# Altium PCB PCB1.PcbDoc
Units mil, origin at the board's own origin, x right, y up, seen from the top; angles counter-clockwise.
Board outline 2425 x 2195 mil, 2 copper layers (Top Layer, Bottom Layer); 9 components, 16 nets, 101 pads, 0 vias.
Unrouted connection lines stored in the file: 2.
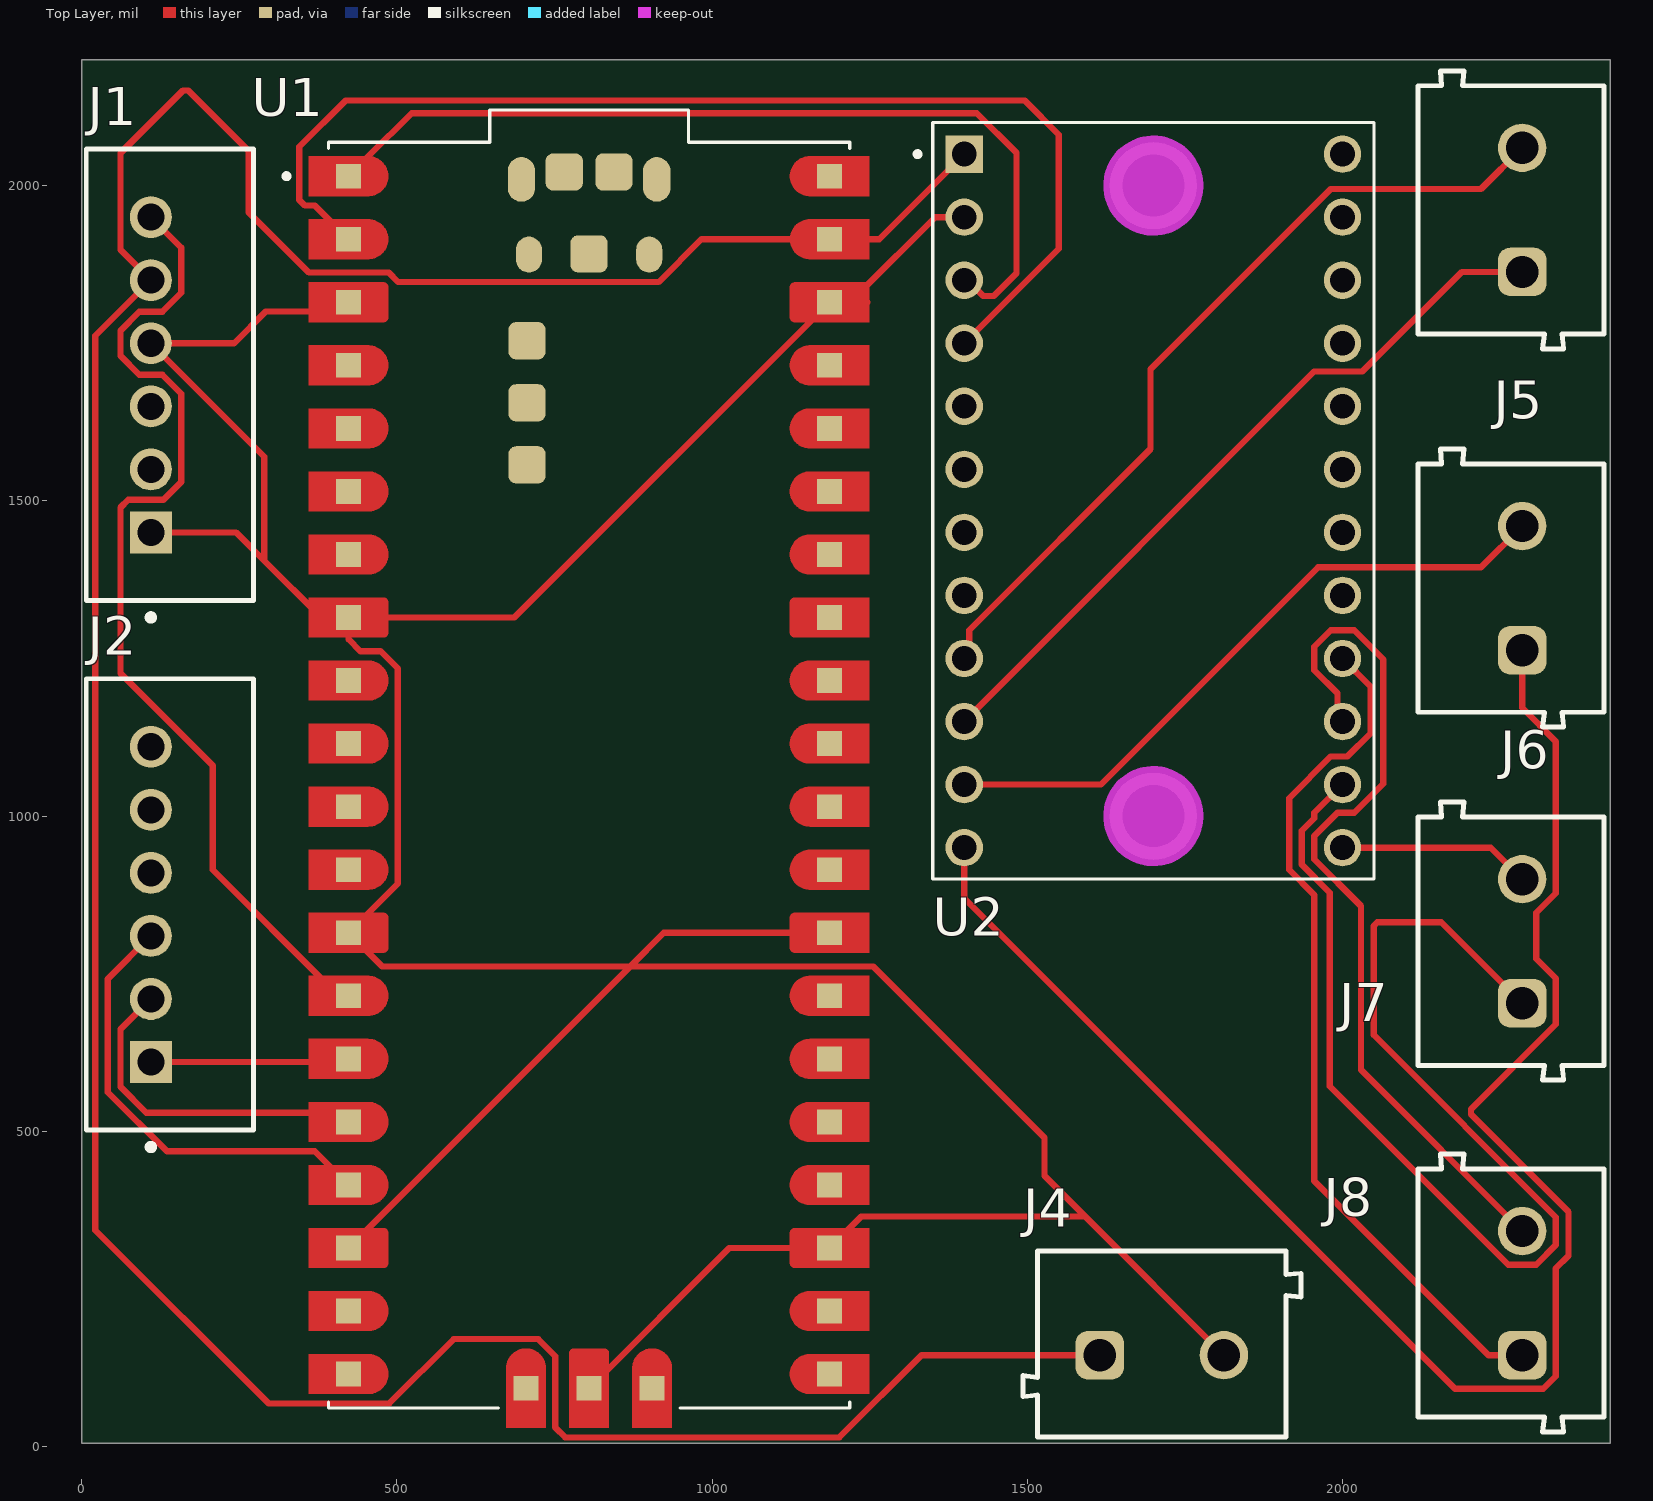
[diagram p0: Top Layer view]
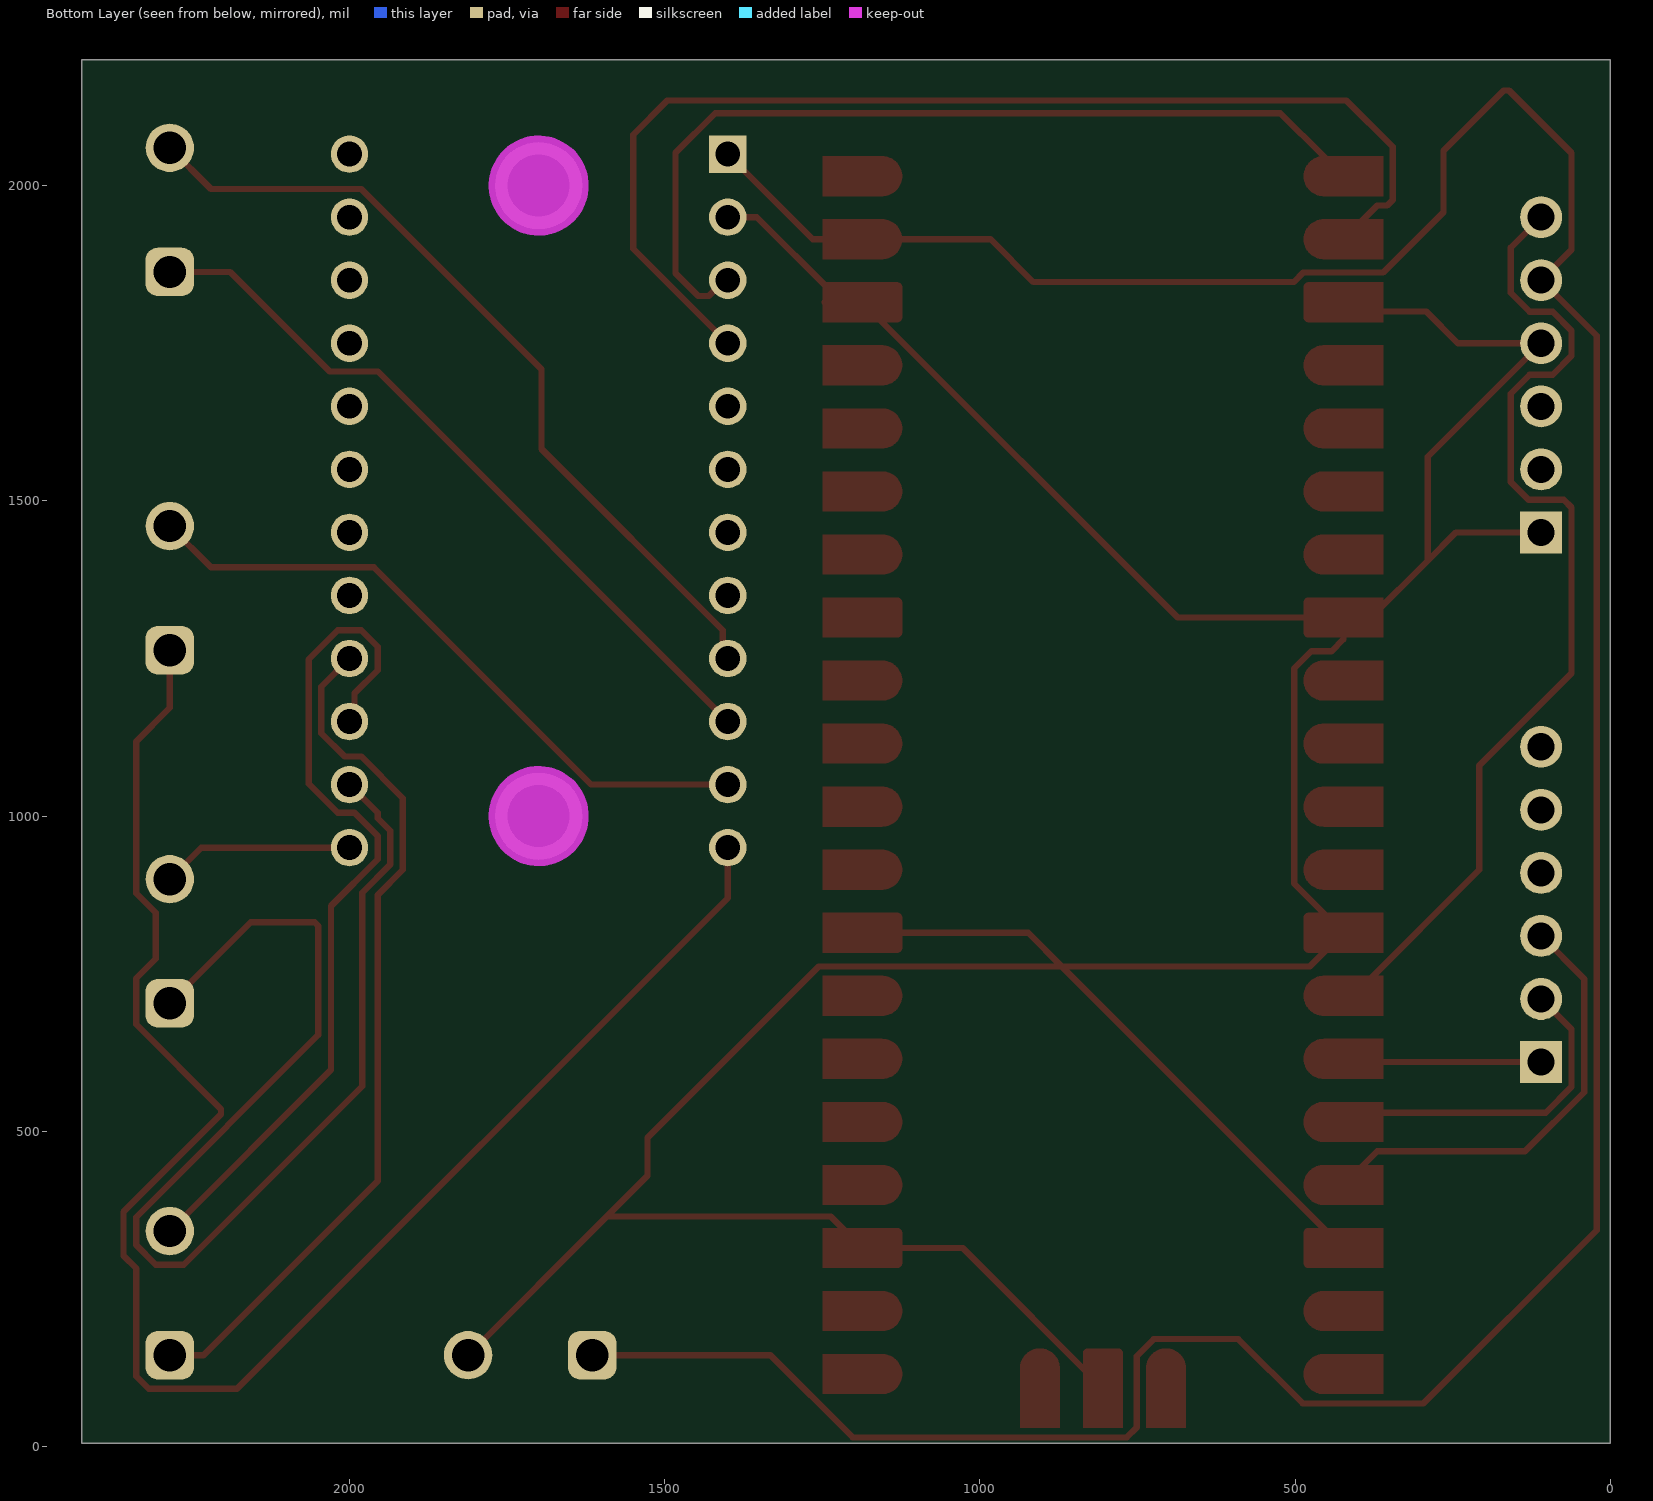
[diagram p1: Bottom Layer view, seen from below]
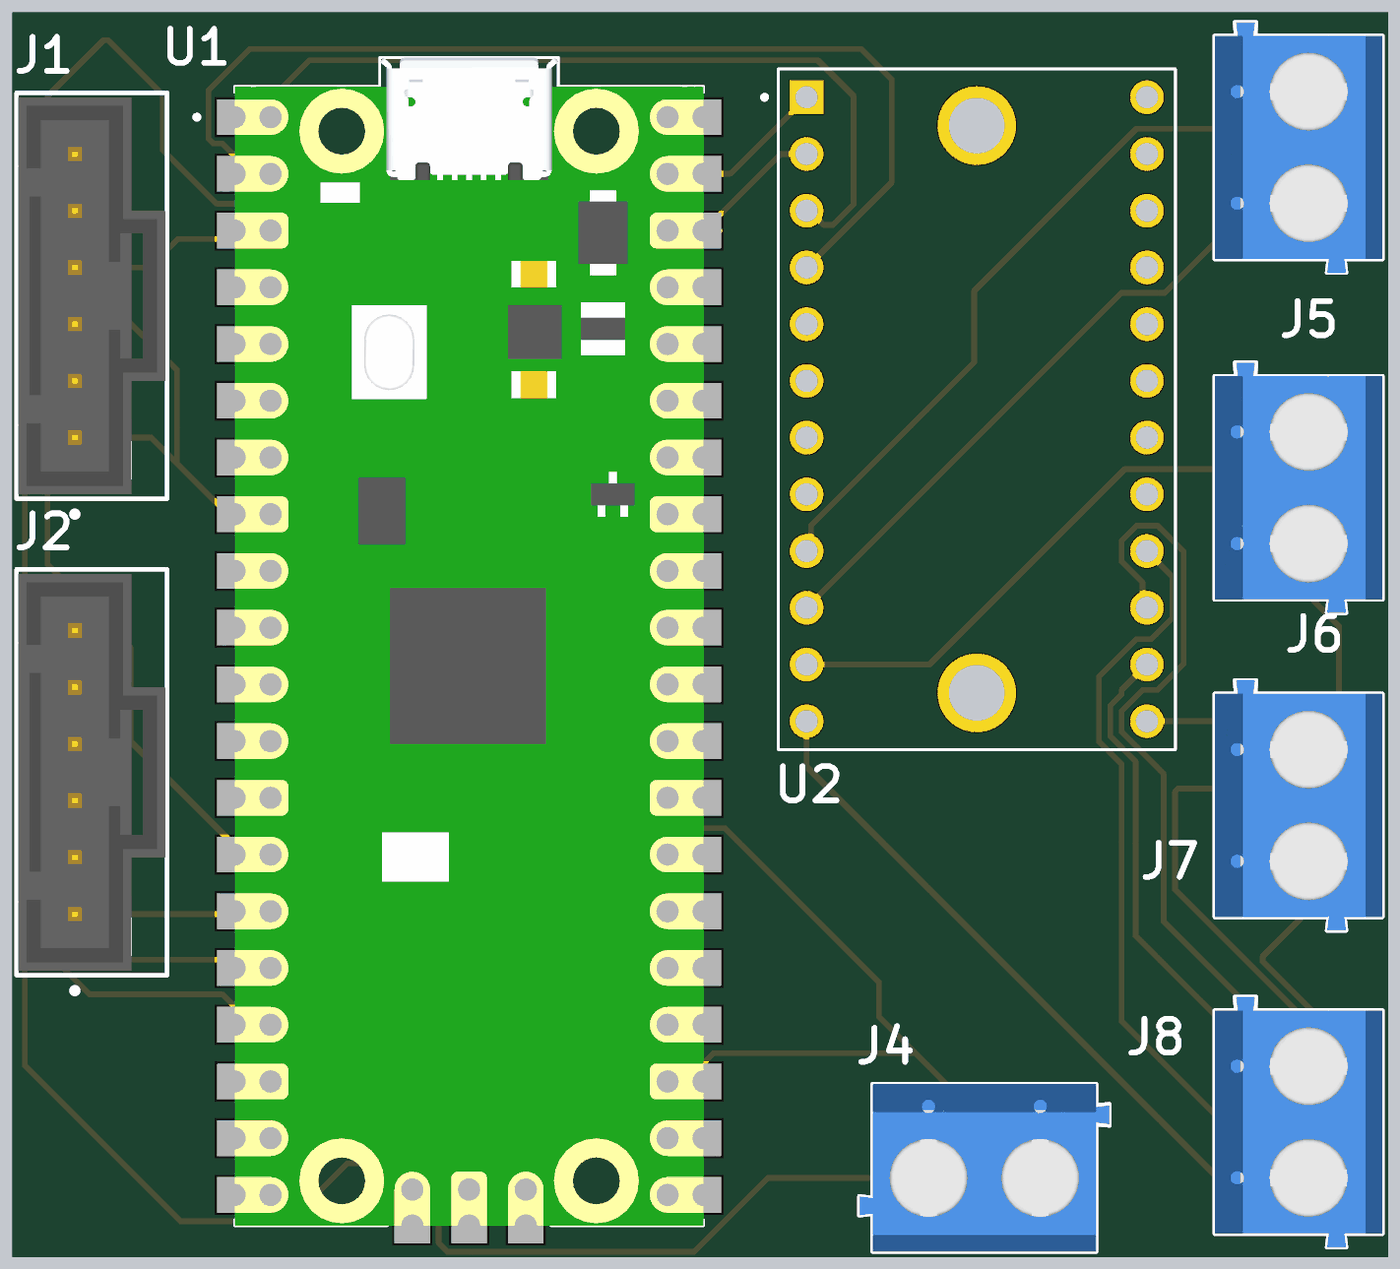
[diagram p2: 3D render of the assembled board from above, using the file's embedded part models]

## Layer stack, top to bottom
Top Solder: solder mask 0.4, Solder Resist, Dk 3.5
Top Layer: signal copper 1.4
Dielectric 1: dielectric 12.6, FR-4, Dk 4.8
Bottom Layer: signal copper 1.4
Bottom Solder: solder mask 0.4, Solder Resist, Dk 3.5

## Board outline
0,5 2425,5 2425,2200 0,2200

## Design rules (kind name [scope] priority, off if disabled: settings)
Clearance [All] p1: gap=10 ignorepadtopadclearanceinfootprint=FALSE except(0: Arc-Hole Track-Hole SMDPad-Hole THPad-Hole Via-Hole Fill-Hole Poly-Hole Region-Hole Text-Hole)
PolygonConnect [All] p1: connectstyle=Relief reliefconductorwidth=10 reliefentries=4 polygonreliefangle="90 Angle" airgapwidth=10
RoutingVias [All] p1: holewidth=28 width=50 viastyle="Through Hole" minholewidth=28 minwidth=50 maxholewidth=28 maxwidth=50
SolderMaskExpansion [All] p1: expansion=4 istentingtop=FALSE
Width [All] p1: maxlimit=10 minlimit=10 preferedwidth=10
30 further rules are at their usual default settings.

## Components (designator, comment, footprint, x,y, rotation, side; value= is the part's Value field where it differs from the comment)
J1 "0705430005" FP-0705430005-MFG 110,1700 r270 top
J2 "0705430005" FP-0705430005-MFG 110,860 r270 top
J4 "691102710002" 691102710002 1713.43,162.72 r0 top
J5 "691102710002" 691102710002 2267.28,1961.57 r90 top
J6 "691102710002" 691102710002 2267.28,1361.57 r90 top
J7 "691102710002" 691102710002 2267.28,801.57 r90 top
J8 "691102710002" 691102710002 2267.28,243.43 r90 top
U1 "SC0915" MODULE_SC0915 805,1065 r0 top
U2 "2717" MODULE_2717 1700,1500 r0 top

## Footprints (in the part's own frame and the unit in brackets; to place one, negate y for a bottom-side part, rotate by r counter-clockwise, add the part's x,y. Pads: shape width x height; smd on the part's side, far side on the other; paste and mask are expansions set on the pad)
691102710002 [mm] "5,00mm - modular - blue - Horizontal entry with pressure clamp - 9,9 mm height - 02p"
  rrect50% 1.95x1.95 hole 1.3: 1(-2.5,-0.45)
  round 1.95 hole 1.3: 2(2.5,-0.45)
  silkscreen extent -5.6,-3.75 5.6,3.75, body extent -5.6,-3.75 5.6,3.75, height 9.96
FP-0705430005-MFG [mm]
  rect 1.69x1.69 hole 1.09 paste-1000 mask+0: 1(6.35,0)
  round 1.69 hole 1.09 paste-1000 mask+0: 2(3.81,0) 3(1.27,0) 4(-1.27,0) 5(-3.81,0) 6(-6.35,0)
  silkscreen extent -9.09,-2.61 9.9,4.13, body extent -9.19,-2.71 9.19,4.23, height 0.25
MODULE_2717 [mm]
  rect 1.508x1.508 / inner round 1.508 / far side rect 1.508x1.508 hole 1 mask+0.05: 1(-7.62,13.97)
  round 1.508 hole 1 mask+0.05: 2(-7.62,11.43) 3(-7.62,8.89) 4(-7.62,6.35) 5(-7.62,3.81) 6(-7.62,1.27) 7(-7.62,-1.27) 8(-7.62,-3.81) 9(-7.62,-6.35) 10(-7.62,-8.89) 11(-7.62,-11.43) 12(-7.62,-13.97) 13(7.62,-13.97) 14(7.62,-11.43) 15(7.62,-8.89) 16(7.62,-6.35) 17(7.62,-3.81) 18(7.62,-1.27) 19(7.62,1.27) 20(7.62,3.81) 21(7.62,6.35) 22(7.62,8.89) 23(7.62,11.43) 24(7.62,13.97)
  round 3.516 hole 2.5 mask+0.05: P1(0,12.7) P2(0,-12.7)
  Keep-Out Layer circle w2.032: c0,-12.7 r1
  Keep-Out Layer circle w2.032: c0,-12.7 r1
  Keep-Out Layer circle w2.032: c0,12.7 r1
  Keep-Out Layer circle w2.032: c0,12.7 r1
  silkscreen extent -9.6,-15.24 8.89,15.24
MODULE_SC0915 [mm]
  rect 1x1 smd paste-1 mask+0: 1(-9.69,24.13) 2(-9.69,21.59) 3(-9.69,19.05) 4(-9.69,16.51) 5(-9.69,13.97) 6(-9.69,11.43) 7(-9.69,8.89) 8(-9.69,6.35) 9(-9.69,3.81) 10(-9.69,1.27) 11(-9.69,-1.27) 12(-9.69,-3.81) 13(-9.69,-6.35) 14(-9.69,-8.89) 15(-9.69,-11.43) 16(-9.69,-13.97) 17(-9.69,-16.51) 18(-9.69,-19.05) 19(-9.69,-21.59) 20(-9.69,-24.13) 21(9.69,-24.13) 22(9.69,-21.59) 23(9.69,-19.05) 24(9.69,-16.51) 25(9.69,-13.97) 26(9.69,-11.43) 27(9.69,-8.89) 28(9.69,-6.35) 29(9.69,-3.81) 30(9.69,-1.27) 31(9.69,1.27) 32(9.69,3.81) 33(9.69,6.35) 34(9.69,8.89) 35(9.69,11.43) 36(9.69,13.97) 37(9.69,16.51) 38(9.69,19.05) 39(9.69,21.59) 40(9.69,24.13) D1(-2.54,-24.7) D2(0,-24.7) D3(2.54,-24.7)
  oval 1.1x1.8 smd: A(-2.725,24) B(2.725,24)
  oval 1.05x1.45 smd: C(-2.425,20.97) D(2.425,20.97)
  rrect40% 1.5x1.5 smd: TP1(0,21) TP2(1,24.3) TP3(-1,24.3) TP4(-2.5,17.5) TP5(-2.5,15) TP6(-2.5,12.5)
  Top Layer region: -8.848,4.609 -8.806,4.606 -8.765,4.6 -8.724,4.593 -8.683,4.583 -8.643,4.571 -8.603,4.557 -8.565,4.541 -8.527,4.523 -8.49,4.503 -8.454,4.481 -8.42,4.457 -8.387,4.432 -8.355,4.405 -8.324,4.376 -8.295,4.345 -8.268,4.313 -8.243,4.28 -8.219,4.246 -8.197,4.21 -8.177,4.173 -8.159,4.135 -8.143,4.097 -8.129,4.057 -8.117,4.017 -8.107,3.976 -8.1,3.935 -8.094,3.894 -8.091,3.852 -8.09,3.81 -8.091,3.768 -8.094,3.726 -8.1,3.685 -8.107,3.644 -8.117,3.603 -8.129,3.563 -8.143,3.523 -8.159,3.485 -8.177,3.447 -8.197,3.41 -8.219,3.374 -8.243,3.34 -8.268,3.307 -8.295,3.275 -8.324,3.244 -8.355,3.215 -8.387,3.188 -8.42,3.163 -8.454,3.139 -8.49,3.117 -8.527,3.097 -8.565,3.079 -8.603,3.063 -8.643,3.049 -8.683,3.037 -8.724,3.027 -8.765,3.02 -8.806,3.014 -8.848,3.011 -8.89,3.01 -11.29,3.01 -11.29,4.61 -8.89,4.61
  Top Layer region: -8.848,2.069 -8.806,2.066 -8.765,2.06 -8.724,2.053 -8.683,2.043 -8.643,2.031 -8.603,2.017 -8.565,2.001 -8.527,1.983 -8.49,1.963 -8.454,1.941 -8.42,1.917 -8.387,1.892 -8.355,1.865 -8.324,1.836 -8.295,1.805 -8.268,1.773 -8.243,1.74 -8.219,1.706 -8.197,1.67 -8.177,1.633 -8.159,1.595 -8.143,1.557 -8.129,1.517 -8.117,1.477 -8.107,1.436 -8.1,1.395 -8.094,1.354 -8.091,1.312 -8.09,1.27 -8.091,1.228 -8.094,1.186 -8.1,1.145 -8.107,1.104 -8.117,1.063 -8.129,1.023 -8.143,0.983 -8.159,0.945 -8.177,0.907 -8.197,0.87 -8.219,0.834 -8.243,0.8 -8.268,0.767 -8.295,0.735 -8.324,0.704 -8.355,0.675 -8.387,0.648 -8.42,0.623 -8.454,0.599 -8.49,0.577 -8.527,0.557 -8.565,0.539 -8.603,0.523 -8.643,0.509 -8.683,0.497 -8.724,0.487 -8.765,0.48 -8.806,0.474 -8.848,0.471 -8.89,0.47 -11.29,0.47 -11.29,2.07 -8.89,2.07
  Top Layer region: -8.848,-0.471 -8.806,-0.474 -8.765,-0.48 -8.724,-0.487 -8.683,-0.497 -8.643,-0.509 -8.603,-0.523 -8.565,-0.539 -8.527,-0.557 -8.49,-0.577 -8.454,-0.599 -8.42,-0.623 -8.387,-0.648 -8.355,-0.675 -8.324,-0.704 -8.295,-0.735 -8.268,-0.767 -8.243,-0.8 -8.219,-0.834 -8.197,-0.87 -8.177,-0.907 -8.159,-0.945 -8.143,-0.983 -8.129,-1.023 -8.117,-1.063 -8.107,-1.104 -8.1,-1.145 -8.094,-1.186 -8.091,-1.228 -8.09,-1.27 -8.091,-1.312 -8.094,-1.354 -8.1,-1.395 -8.107,-1.436 -8.117,-1.477 -8.129,-1.517 -8.143,-1.557 -8.159,-1.595 -8.177,-1.633 -8.197,-1.67 -8.219,-1.706 -8.243,-1.74 -8.268,-1.773 -8.295,-1.805 -8.324,-1.836 -8.355,-1.865 -8.387,-1.892 -8.42,-1.917 -8.454,-1.941 -8.49,-1.963 -8.527,-1.983 -8.565,-2.001 -8.603,-2.017 -8.643,-2.031 -8.683,-2.043 -8.724,-2.053 -8.765,-2.06 -8.806,-2.066 -8.848,-2.069 -8.89,-2.07 -11.29,-2.07 -11.29,-0.47 -8.89,-0.47
  Top Layer region: -8.848,-3.011 -8.806,-3.014 -8.765,-3.02 -8.724,-3.027 -8.683,-3.037 -8.643,-3.049 -8.603,-3.063 -8.565,-3.079 -8.527,-3.097 -8.49,-3.117 -8.454,-3.139 -8.42,-3.163 -8.387,-3.188 -8.355,-3.215 -8.324,-3.244 -8.295,-3.275 -8.268,-3.307 -8.243,-3.34 -8.219,-3.374 -8.197,-3.41 -8.177,-3.447 -8.159,-3.485 -8.143,-3.523 -8.129,-3.563 -8.117,-3.603 -8.107,-3.644 -8.1,-3.685 -8.094,-3.726 -8.091,-3.768 -8.09,-3.81 -8.091,-3.852 -8.094,-3.894 -8.1,-3.935 -8.107,-3.976 -8.117,-4.017 -8.129,-4.057 -8.143,-4.097 -8.159,-4.135 -8.177,-4.173 -8.197,-4.21 -8.219,-4.246 -8.243,-4.28 -8.268,-4.313 -8.295,-4.345 -8.324,-4.376 -8.355,-4.405 -8.387,-4.432 -8.42,-4.457 -8.454,-4.481 -8.49,-4.503 -8.527,-4.523 -8.565,-4.541 -8.603,-4.557 -8.643,-4.571 -8.683,-4.583 -8.724,-4.593 -8.765,-4.6 -8.806,-4.606 -8.848,-4.609 -8.89,-4.61 -11.29,-4.61 -11.29,-3.01 -8.89,-3.01
  Top Layer region: -8.848,-8.091 -8.806,-8.094 -8.765,-8.1 -8.724,-8.107 -8.683,-8.117 -8.643,-8.129 -8.603,-8.143 -8.565,-8.159 -8.527,-8.177 -8.49,-8.197 -8.454,-8.219 -8.42,-8.243 -8.387,-8.268 -8.355,-8.295 -8.324,-8.324 -8.295,-8.355 -8.268,-8.387 -8.243,-8.42 -8.219,-8.454 -8.197,-8.49 -8.177,-8.527 -8.159,-8.565 -8.143,-8.603 -8.129,-8.643 -8.117,-8.683 -8.107,-8.724 -8.1,-8.765 -8.094,-8.806 -8.091,-8.848 -8.09,-8.89 -8.091,-8.932 -8.094,-8.974 -8.1,-9.015 -8.107,-9.056 -8.117,-9.097 -8.129,-9.137 -8.143,-9.177 -8.159,-9.215 -8.177,-9.253 -8.197,-9.29 -8.219,-9.326 -8.243,-9.36 -8.268,-9.393 -8.295,-9.425 -8.324,-9.456 -8.355,-9.485 -8.387,-9.512 -8.42,-9.537 -8.454,-9.561 -8.49,-9.583 -8.527,-9.603 -8.565,-9.621 -8.603,-9.637 -8.643,-9.651 -8.683,-9.663 -8.724,-9.673 -8.765,-9.68 -8.806,-9.686 -8.848,-9.689 -8.89,-9.69 -11.29,-9.69 -11.29,-8.09 -8.89,-8.09
  Top Layer region: -8.848,-10.631 -8.806,-10.634 -8.765,-10.64 -8.724,-10.647 -8.683,-10.657 -8.643,-10.669 -8.603,-10.683 -8.565,-10.699 -8.527,-10.717 -8.49,-10.737 -8.454,-10.759 -8.42,-10.783 -8.387,-10.808 -8.355,-10.835 -8.324,-10.864 -8.295,-10.895 -8.268,-10.927 -8.243,-10.96 -8.219,-10.994 -8.197,-11.03 -8.177,-11.067 -8.159,-11.105 -8.143,-11.143 -8.129,-11.183 -8.117,-11.223 -8.107,-11.264 -8.1,-11.305 -8.094,-11.346 -8.091,-11.388 -8.09,-11.43 -8.091,-11.472 -8.094,-11.514 -8.1,-11.555 -8.107,-11.596 -8.117,-11.637 -8.129,-11.677 -8.143,-11.717 -8.159,-11.755 -8.177,-11.793 -8.197,-11.83 -8.219,-11.866 -8.243,-11.9 -8.268,-11.933 -8.295,-11.965 -8.324,-11.996 -8.355,-12.025 -8.387,-12.052 -8.42,-12.077 -8.454,-12.101 -8.49,-12.123 -8.527,-12.143 -8.565,-12.161 -8.603,-12.177 -8.643,-12.191 -8.683,-12.203 -8.724,-12.213 -8.765,-12.22 -8.806,-12.226 -8.848,-12.229 -8.89,-12.23 -11.29,-12.23 -11.29,-10.63 -8.89,-10.63
  Top Layer region: -8.848,-13.171 -8.806,-13.174 -8.765,-13.18 -8.724,-13.187 -8.683,-13.197 -8.643,-13.209 -8.603,-13.223 -8.565,-13.239 -8.527,-13.257 -8.49,-13.277 -8.454,-13.299 -8.42,-13.323 -8.387,-13.348 -8.355,-13.375 -8.324,-13.404 -8.295,-13.435 -8.268,-13.467 -8.243,-13.5 -8.219,-13.534 -8.197,-13.57 -8.177,-13.607 -8.159,-13.645 -8.143,-13.683 -8.129,-13.723 -8.117,-13.763 -8.107,-13.804 -8.1,-13.845 -8.094,-13.886 -8.091,-13.928 -8.09,-13.97 -8.091,-14.012 -8.094,-14.054 -8.1,-14.095 -8.107,-14.136 -8.117,-14.177 -8.129,-14.217 -8.143,-14.257 -8.159,-14.295 -8.177,-14.333 -8.197,-14.37 -8.219,-14.406 -8.243,-14.44 -8.268,-14.473 -8.295,-14.505 -8.324,-14.536 -8.355,-14.565 -8.387,-14.592 -8.42,-14.617 -8.454,-14.641 -8.49,-14.663 -8.527,-14.683 -8.565,-14.701 -8.603,-14.717 -8.643,-14.731 -8.683,-14.743 -8.724,-14.753 -8.765,-14.76 -8.806,-14.766 -8.848,-14.769 -8.89,-14.77 -11.29,-14.77 -11.29,-13.17 -8.89,-13.17
  Top Layer region: -8.848,-15.711 -8.806,-15.714 -8.765,-15.72 -8.724,-15.727 -8.683,-15.737 -8.643,-15.749 -8.603,-15.763 -8.565,-15.779 -8.527,-15.797 -8.49,-15.817 -8.454,-15.839 -8.42,-15.863 -8.387,-15.888 -8.355,-15.915 -8.324,-15.944 -8.295,-15.975 -8.268,-16.007 -8.243,-16.04 -8.219,-16.074 -8.197,-16.11 -8.177,-16.147 -8.159,-16.185 -8.143,-16.223 -8.129,-16.263 -8.117,-16.303 -8.107,-16.344 -8.1,-16.385 -8.094,-16.426 -8.091,-16.468 -8.09,-16.51 -8.091,-16.552 -8.094,-16.594 -8.1,-16.635 -8.107,-16.676 -8.117,-16.717 -8.129,-16.757 -8.143,-16.797 -8.159,-16.835 -8.177,-16.873 -8.197,-16.91 -8.219,-16.946 -8.243,-16.98 -8.268,-17.013 -8.295,-17.045 -8.324,-17.076 -8.355,-17.105 -8.387,-17.132 -8.42,-17.157 -8.454,-17.181 -8.49,-17.203 -8.527,-17.223 -8.565,-17.241 -8.603,-17.257 -8.643,-17.271 -8.683,-17.283 -8.724,-17.293 -8.765,-17.3 -8.806,-17.306 -8.848,-17.309 -8.89,-17.31 -11.29,-17.31 -11.29,-15.71 -8.89,-15.71
  Top Layer region: -8.848,-20.791 -8.806,-20.794 -8.765,-20.8 -8.724,-20.807 -8.683,-20.817 -8.643,-20.829 -8.603,-20.843 -8.565,-20.859 -8.527,-20.877 -8.49,-20.897 -8.454,-20.919 -8.42,-20.943 -8.387,-20.968 -8.355,-20.995 -8.324,-21.024 -8.295,-21.055 -8.268,-21.087 -8.243,-21.12 -8.219,-21.154 -8.197,-21.19 -8.177,-21.227 -8.159,-21.265 -8.143,-21.303 -8.129,-21.343 -8.117,-21.383 -8.107,-21.424 -8.1,-21.465 -8.094,-21.506 -8.091,-21.548 -8.09,-21.59 -8.091,-21.632 -8.094,-21.674 -8.1,-21.715 -8.107,-21.756 -8.117,-21.797 -8.129,-21.837 -8.143,-21.877 -8.159,-21.915 -8.177,-21.953 -8.197,-21.99 -8.219,-22.026 -8.243,-22.06 -8.268,-22.093 -8.295,-22.125 -8.324,-22.156 -8.355,-22.185 -8.387,-22.212 -8.42,-22.237 -8.454,-22.261 -8.49,-22.283 -8.527,-22.303 -8.565,-22.321 -8.603,-22.337 -8.643,-22.351 -8.683,-22.363 -8.724,-22.373 -8.765,-22.38 -8.806,-22.386 -8.848,-22.389 -8.89,-22.39 -11.29,-22.39 -11.29,-20.79 -8.89,-20.79
  Top Layer region: -8.848,-23.331 -8.806,-23.334 -8.765,-23.34 -8.724,-23.347 -8.683,-23.357 -8.643,-23.369 -8.603,-23.383 -8.565,-23.399 -8.527,-23.417 -8.49,-23.437 -8.454,-23.459 -8.42,-23.483 -8.387,-23.508 -8.355,-23.535 -8.324,-23.564 -8.295,-23.595 -8.268,-23.627 -8.243,-23.66 -8.219,-23.694 -8.197,-23.73 -8.177,-23.767 -8.159,-23.805 -8.143,-23.843 -8.129,-23.883 -8.117,-23.923 -8.107,-23.964 -8.1,-24.005 -8.094,-24.046 -8.091,-24.088 -8.09,-24.13 -8.091,-24.172 -8.094,-24.214 -8.1,-24.255 -8.107,-24.296 -8.117,-24.337 -8.129,-24.377 -8.143,-24.417 -8.159,-24.455 -8.177,-24.493 -8.197,-24.53 -8.219,-24.566 -8.243,-24.6 -8.268,-24.633 -8.295,-24.665 -8.324,-24.696 -8.355,-24.725 -8.387,-24.752 -8.42,-24.777 -8.454,-24.801 -8.49,-24.823 -8.527,-24.843 -8.565,-24.861 -8.603,-24.877 -8.643,-24.891 -8.683,-24.903 -8.724,-24.913 -8.765,-24.92 -8.806,-24.926 -8.848,-24.929 -8.89,-24.93 -11.29,-24.93 -11.29,-23.33 -8.89,-23.33
  Top Layer region: -8.269,19.849 -8.259,19.848 -8.248,19.846 -8.238,19.843 -8.228,19.84 -8.218,19.837 -8.209,19.833 -8.199,19.828 -8.19,19.823 -8.181,19.818 -8.172,19.812 -8.164,19.805 -8.156,19.799 -8.149,19.791 -8.141,19.784 -8.135,19.776 -8.128,19.768 -8.122,19.759 -8.117,19.75 -8.112,19.741 -8.107,19.731 -8.103,19.722 -8.1,19.712 -8.097,19.702 -8.094,19.692 -8.092,19.681 -8.091,19.671 -8.09,19.66 -8.09,19.65 -8.09,18.45 -8.09,18.44 -8.091,18.429 -8.092,18.419 -8.094,18.408 -8.097,18.398 -8.1,18.388 -8.103,18.378 -8.107,18.369 -8.112,18.359 -8.117,18.35 -8.122,18.341 -8.128,18.332 -8.135,18.324 -8.141,18.316 -8.149,18.309 -8.156,18.301 -8.164,18.295 -8.172,18.288 -8.181,18.282 -8.19,18.277 -8.199,18.272 -8.209,18.267 -8.218,18.263 -8.228,18.26 -8.238,18.257 -8.248,18.254 -8.259,18.252 -8.269,18.251 -8.28,18.25 -11.29,18.25 -11.29,19.85 -8.28,19.85
  Top Layer region: -8.269,7.149 -8.259,7.148 -8.248,7.146 -8.238,7.143 -8.228,7.14 -8.218,7.137 -8.209,7.133 -8.199,7.128 -8.19,7.123 -8.181,7.118 -8.172,7.112 -8.164,7.105 -8.156,7.099 -8.149,7.091 -8.141,7.084 -8.135,7.076 -8.128,7.068 -8.122,7.059 -8.117,7.05 -8.112,7.041 -8.107,7.031 -8.103,7.022 -8.1,7.012 -8.097,7.002 -8.094,6.992 -8.092,6.981 -8.091,6.971 -8.09,6.96 -8.09,6.95 -8.09,5.75 -8.09,5.74 -8.091,5.729 -8.092,5.719 -8.094,5.708 -8.097,5.698 -8.1,5.688 -8.103,5.678 -8.107,5.669 -8.112,5.659 -8.117,5.65 -8.122,5.641 -8.128,5.632 -8.135,5.624 -8.141,5.616 -8.149,5.609 -8.156,5.601 -8.164,5.595 -8.172,5.588 -8.181,5.582 -8.19,5.577 -8.199,5.572 -8.209,5.567 -8.218,5.563 -8.228,5.56 -8.238,5.557 -8.248,5.554 -8.259,5.552 -8.269,5.551 -8.28,5.55 -11.29,5.55 -11.29,7.15 -8.28,7.15
  Top Layer region: -8.269,-5.551 -8.259,-5.552 -8.248,-5.554 -8.238,-5.557 -8.228,-5.56 -8.218,-5.563 -8.209,-5.567 -8.199,-5.572 -8.19,-5.577 -8.181,-5.582 -8.172,-5.588 -8.164,-5.595 -8.156,-5.601 -8.149,-5.609 -8.141,-5.616 -8.135,-5.624 -8.128,-5.632 -8.122,-5.641 -8.117,-5.65 -8.112,-5.659 -8.107,-5.669 -8.103,-5.678 -8.1,-5.688 -8.097,-5.698 -8.094,-5.708 -8.092,-5.719 -8.091,-5.729 -8.09,-5.74 -8.09,-5.75 -8.09,-6.95 -8.09,-6.96 -8.091,-6.971 -8.092,-6.981 -8.094,-6.992 -8.097,-7.002 -8.1,-7.012 -8.103,-7.022 -8.107,-7.031 -8.112,-7.041 -8.117,-7.05 -8.122,-7.059 -8.128,-7.068 -8.135,-7.076 -8.141,-7.084 -8.149,-7.091 -8.156,-7.099 -8.164,-7.105 -8.172,-7.112 -8.181,-7.118 -8.19,-7.123 -8.199,-7.128 -8.209,-7.133 -8.218,-7.137 -8.228,-7.14 -8.238,-7.143 -8.248,-7.146 -8.259,-7.148 -8.269,-7.149 -8.28,-7.15 -11.29,-7.15 -11.29,-5.55 -8.28,-5.55
  Top Layer region: -8.269,-18.251 -8.259,-18.252 -8.248,-18.254 -8.238,-18.257 -8.228,-18.26 -8.218,-18.263 -8.209,-18.267 -8.199,-18.272 -8.19,-18.277 -8.181,-18.282 -8.172,-18.288 -8.164,-18.295 -8.156,-18.301 -8.149,-18.309 -8.141,-18.316 -8.135,-18.324 -8.128,-18.332 -8.122,-18.341 -8.117,-18.35 -8.112,-18.359 -8.107,-18.369 -8.103,-18.378 -8.1,-18.388 -8.097,-18.398 -8.094,-18.408 -8.092,-18.419 -8.091,-18.429 -8.09,-18.44 -8.09,-18.45 -8.09,-19.65 -8.09,-19.66 -8.091,-19.671 -8.092,-19.681 -8.094,-19.692 -8.097,-19.702 -8.1,-19.712 -8.103,-19.722 -8.107,-19.731 -8.112,-19.741 -8.117,-19.75 -8.122,-19.759 -8.128,-19.768 -8.135,-19.776 -8.141,-19.784 -8.149,-19.791 -8.156,-19.799 -8.164,-19.805 -8.172,-19.812 -8.181,-19.818 -8.19,-19.823 -8.199,-19.828 -8.209,-19.833 -8.218,-19.837 -8.228,-19.84 -8.238,-19.843 -8.248,-19.846 -8.259,-19.848 -8.269,-19.849 -8.28,-19.85 -11.29,-19.85 -11.29,-18.25 -8.28,-18.25
  Top Layer region: -8.848,22.389 -8.806,22.386 -8.765,22.38 -8.724,22.373 -8.683,22.363 -8.643,22.351 -8.603,22.337 -8.565,22.321 -8.527,22.303 -8.49,22.283 -8.454,22.261 -8.42,22.237 -8.387,22.212 -8.355,22.185 -8.324,22.156 -8.295,22.125 -8.268,22.093 -8.243,22.06 -8.219,22.026 -8.197,21.99 -8.177,21.953 -8.159,21.915 -8.143,21.877 -8.129,21.837 -8.117,21.797 -8.107,21.756 -8.1,21.715 -8.094,21.674 -8.091,21.632 -8.09,21.59 -8.091,21.548 -8.094,21.506 -8.1,21.465 -8.107,21.424 -8.117,21.383 -8.129,21.343 -8.143,21.303 -8.159,21.265 -8.177,21.227 -8.197,21.19 -8.219,21.154 -8.243,21.12 -8.268,21.087 -8.295,21.055 -8.324,21.024 -8.355,20.995 -8.387,20.968 -8.42,20.943 -8.454,20.919 -8.49,20.897 -8.527,20.877 -8.565,20.859 -8.603,20.843 -8.643,20.829 -8.683,20.817 -8.724,20.807 -8.765,20.8 -8.806,20.794 -8.848,20.791 -8.89,20.79 -11.29,20.79 -11.29,22.39 -8.89,22.39
  Top Layer region: -8.848,17.309 -8.806,17.306 -8.765,17.3 -8.724,17.293 -8.683,17.283 -8.643,17.271 -8.603,17.257 -8.565,17.241 -8.527,17.223 -8.49,17.203 -8.454,17.181 -8.42,17.157 -8.387,17.132 -8.355,17.105 -8.324,17.076 -8.295,17.045 -8.268,17.013 -8.243,16.98 -8.219,16.946 -8.197,16.91 -8.177,16.873 -8.159,16.835 -8.143,16.797 -8.129,16.757 -8.117,16.717 -8.107,16.676 -8.1,16.635 -8.094,16.594 -8.091,16.552 -8.09,16.51 -8.091,16.468 -8.094,16.426 -8.1,16.385 -8.107,16.344 -8.117,16.303 -8.129,16.263 -8.143,16.223 -8.159,16.185 -8.177,16.147 -8.197,16.11 -8.219,16.074 -8.243,16.04 -8.268,16.007 -8.295,15.975 -8.324,15.944 -8.355,15.915 -8.387,15.888 -8.42,15.863 -8.454,15.839 -8.49,15.817 -8.527,15.797 -8.565,15.779 -8.603,15.763 -8.643,15.749 -8.683,15.737 -8.724,15.727 -8.765,15.72 -8.806,15.714 -8.848,15.711 -8.89,15.71 -11.29,15.71 -11.29,17.31 -8.89,17.31
  Top Layer region: -8.848,14.769 -8.806,14.766 -8.765,14.76 -8.724,14.753 -8.683,14.743 -8.643,14.731 -8.603,14.717 -8.565,14.701 -8.527,14.683 -8.49,14.663 -8.454,14.641 -8.42,14.617 -8.387,14.592 -8.355,14.565 -8.324,14.536 -8.295,14.505 -8.268,14.473 -8.243,14.44 -8.219,14.406 -8.197,14.37 -8.177,14.333 -8.159,14.295 -8.143,14.257 -8.129,14.217 -8.117,14.177 -8.107,14.136 -8.1,14.095 -8.094,14.054 -8.091,14.012 -8.09,13.97 -8.091,13.928 -8.094,13.886 -8.1,13.845 -8.107,13.804 -8.117,13.763 -8.129,13.723 -8.143,13.683 -8.159,13.645 -8.177,13.607 -8.197,13.57 -8.219,13.534 -8.243,13.5 -8.268,13.467 -8.295,13.435 -8.324,13.404 -8.355,13.375 -8.387,13.348 -8.42,13.323 -8.454,13.299 -8.49,13.277 -8.527,13.257 -8.565,13.239 -8.603,13.223 -8.643,13.209 -8.683,13.197 -8.724,13.187 -8.765,13.18 -8.806,13.174 -8.848,13.171 -8.89,13.17 -11.29,13.17 -11.29,14.77 -8.89,14.77
  Top Layer region: -8.848,12.229 -8.806,12.226 -8.765,12.22 -8.724,12.213 -8.683,12.203 -8.643,12.191 -8.603,12.177 -8.565,12.161 -8.527,12.143 -8.49,12.123 -8.454,12.101 -8.42,12.077 -8.387,12.052 -8.355,12.025 -8.324,11.996 -8.295,11.965 -8.268,11.933 -8.243,11.9 -8.219,11.866 -8.197,11.83 -8.177,11.793 -8.159,11.755 -8.143,11.717 -8.129,11.677 -8.117,11.637 -8.107,11.596 -8.1,11.555 -8.094,11.514 -8.091,11.472 -8.09,11.43 -8.091,11.388 -8.094,11.346 -8.1,11.305 -8.107,11.264 -8.117,11.223 -8.129,11.183 -8.143,11.143 -8.159,11.105 -8.177,11.067 -8.197,11.03 -8.219,10.994 -8.243,10.96 -8.268,10.927 -8.295,10.895 -8.324,10.864 -8.355,10.835 -8.387,10.808 -8.42,10.783 -8.454,10.759 -8.49,10.737 -8.527,10.717 -8.565,10.699 -8.603,10.683 -8.643,10.669 -8.683,10.657 -8.724,10.647 -8.765,10.64 -8.806,10.634 -8.848,10.631 -8.89,10.63 -11.29,10.63 -11.29,12.23 -8.89,12.23
  Top Layer region: -8.848,9.689 -8.806,9.686 -8.765,9.68 -8.724,9.673 -8.683,9.663 -8.643,9.651 -8.603,9.637 -8.565,9.621 -8.527,9.603 -8.49,9.583 -8.454,9.561 -8.42,9.537 -8.387,9.512 -8.355,9.485 -8.324,9.456 -8.295,9.425 -8.268,9.393 -8.243,9.36 -8.219,9.326 -8.197,9.29 -8.177,9.253 -8.159,9.215 -8.143,9.177 -8.129,9.137 -8.117,9.097 -8.107,9.056 -8.1,9.015 -8.094,8.974 -8.091,8.932 -8.09,8.89 -8.091,8.848 -8.094,8.806 -8.1,8.765 -8.107,8.724 -8.117,8.683 -8.129,8.643 -8.143,8.603 -8.159,8.565 -8.177,8.527 -8.197,8.49 -8.219,8.454 -8.243,8.42 -8.268,8.387 -8.295,8.355 -8.324,8.324 -8.355,8.295 -8.387,8.268 -8.42,8.243 -8.454,8.219 -8.49,8.197 -8.527,8.177 -8.565,8.159 -8.603,8.143 -8.643,8.129 -8.683,8.117 -8.724,8.107 -8.765,8.1 -8.806,8.094 -8.848,8.091 -8.89,8.09 -11.29,8.09 -11.29,9.69 -8.89,9.69
  Top Layer region: 11.29,18.25 8.28,18.25 8.269,18.251 8.259,18.252 8.248,18.254 8.238,18.257 8.228,18.26 8.218,18.263 8.209,18.267 8.199,18.272 8.19,18.277 8.181,18.282 8.172,18.288 8.164,18.295 8.156,18.301 8.149,18.309 8.141,18.316 8.135,18.324 8.128,18.332 8.122,18.341 8.117,18.35 8.112,18.359 8.107,18.369 8.103,18.378 8.1,18.388 8.097,18.398 8.094,18.408 8.092,18.419 8.091,18.429 8.09,18.44 8.09,18.45 8.09,19.65 8.09,19.66 8.091,19.671 8.092,19.681 8.094,19.692 8.097,19.702 8.1,19.712 8.103,19.722 8.107,19.731 8.112,19.741 8.117,19.75 8.122,19.759 8.128,19.768 8.135,19.776 8.141,19.784 8.149,19.791 8.156,19.799 8.164,19.805 8.172,19.812 8.181,19.818 8.19,19.823 8.199,19.828 8.209,19.833 8.218,19.837 8.228,19.84 8.238,19.843 8.248,19.846 8.259,19.848 8.269,19.849 8.28,19.85 11.29,19.85
  Top Layer region: 11.29,20.79 8.89,20.79 8.848,20.791 8.806,20.794 8.765,20.8 8.724,20.807 8.683,20.817 8.643,20.829 8.603,20.843 8.565,20.859 8.527,20.877 8.49,20.897 8.454,20.919 8.42,20.943 8.387,20.968 8.355,20.995 8.324,21.024 8.295,21.055 8.268,21.087 8.243,21.12 8.219,21.154 8.197,21.19 8.177,21.227 8.159,21.265 8.143,21.303 8.129,21.343 8.117,21.383 8.107,21.424 8.1,21.465 8.094,21.506 8.091,21.548 8.09,21.59 8.091,21.632 8.094,21.674 8.1,21.715 8.107,21.756 8.117,21.797 8.129,21.837 8.143,21.877 8.159,21.915 8.177,21.953 8.197,21.99 8.219,22.026 8.243,22.06 8.268,22.093 8.295,22.125 8.324,22.156 8.355,22.185 8.387,22.212 8.42,22.237 8.454,22.261 8.49,22.283 8.527,22.303 8.565,22.321 8.603,22.337 8.643,22.351 8.683,22.363 8.724,22.373 8.765,22.38 8.806,22.386 8.848,22.389 8.89,22.39 11.29,22.39
  Top Layer region: 11.29,10.63 8.89,10.63 8.848,10.631 8.806,10.634 8.765,10.64 8.724,10.647 8.683,10.657 8.643,10.669 8.603,10.683 8.565,10.699 8.527,10.717 8.49,10.737 8.454,10.759 8.42,10.783 8.387,10.808 8.355,10.835 8.324,10.864 8.295,10.895 8.268,10.927 8.243,10.96 8.219,10.994 8.197,11.03 8.177,11.067 8.159,11.105 8.143,11.143 8.129,11.183 8.117,11.223 8.107,11.264 8.1,11.305 8.094,11.346 8.091,11.388 8.09,11.43 8.091,11.472 8.094,11.514 8.1,11.555 8.107,11.596 8.117,11.637 8.129,11.677 8.143,11.717 8.159,11.755 8.177,11.793 8.197,11.83 8.219,11.866 8.243,11.9 8.268,11.933 8.295,11.965 8.324,11.996 8.355,12.025 8.387,12.052 8.42,12.077 8.454,12.101 8.49,12.123 8.527,12.143 8.565,12.161 8.603,12.177 8.643,12.191 8.683,12.203 8.724,12.213 8.765,12.22 8.806,12.226 8.848,12.229 8.89,12.23 11.29,12.23
  Top Layer region: 11.29,-2.07 8.89,-2.07 8.848,-2.069 8.806,-2.066 8.765,-2.06 8.724,-2.053 8.683,-2.043 8.643,-2.031 8.603,-2.017 8.565,-2.001 8.527,-1.983 8.49,-1.963 8.454,-1.941 8.42,-1.917 8.387,-1.892 8.355,-1.865 8.324,-1.836 8.295,-1.805 8.268,-1.773 8.243,-1.74 8.219,-1.706 8.197,-1.67 8.177,-1.633 8.159,-1.595 8.143,-1.557 8.129,-1.517 8.117,-1.477 8.107,-1.436 8.1,-1.395 8.094,-1.354 8.091,-1.312 8.09,-1.27 8.091,-1.228 8.094,-1.186 8.1,-1.145 8.107,-1.104 8.117,-1.063 8.129,-1.023 8.143,-0.983 8.159,-0.945 8.177,-0.907 8.197,-0.87 8.219,-0.834 8.243,-0.8 8.268,-0.767 8.295,-0.735 8.324,-0.704 8.355,-0.675 8.387,-0.648 8.42,-0.623 8.454,-0.599 8.49,-0.577 8.527,-0.557 8.565,-0.539 8.603,-0.523 8.643,-0.509 8.683,-0.497 8.724,-0.487 8.765,-0.48 8.806,-0.474 8.848,-0.471 8.89,-0.47 11.29,-0.47
  Top Layer region: 11.29,-4.61 8.89,-4.61 8.848,-4.609 8.806,-4.606 8.765,-4.6 8.724,-4.593 8.683,-4.583 8.643,-4.571 8.603,-4.557 8.565,-4.541 8.527,-4.523 8.49,-4.503 8.454,-4.481 8.42,-4.457 8.387,-4.432 8.355,-4.405 8.324,-4.376 8.295,-4.345 8.268,-4.313 8.243,-4.28 8.219,-4.246 8.197,-4.21 8.177,-4.173 8.159,-4.135 8.143,-4.097 8.129,-4.057 8.117,-4.017 8.107,-3.976 8.1,-3.935 8.094,-3.894 8.091,-3.852 8.09,-3.81 8.091,-3.768 8.094,-3.726 8.1,-3.685 8.107,-3.644 8.117,-3.603 8.129,-3.563 8.143,-3.523 8.159,-3.485 8.177,-3.447 8.197,-3.41 8.219,-3.374 8.243,-3.34 8.268,-3.307 8.295,-3.275 8.324,-3.244 8.355,-3.215 8.387,-3.188 8.42,-3.163 8.454,-3.139 8.49,-3.117 8.527,-3.097 8.565,-3.079 8.603,-3.063 8.643,-3.049 8.683,-3.037 8.724,-3.027 8.765,-3.02 8.806,-3.014 8.848,-3.011 8.89,-3.01 11.29,-3.01
  Top Layer region: 11.29,-7.15 8.28,-7.15 8.269,-7.149 8.259,-7.148 8.248,-7.146 8.238,-7.143 8.228,-7.14 8.218,-7.137 8.209,-7.133 8.199,-7.128 8.19,-7.123 8.181,-7.118 8.172,-7.112 8.164,-7.105 8.156,-7.099 8.149,-7.091 8.141,-7.084 8.135,-7.076 8.128,-7.068 8.122,-7.059 8.117,-7.05 8.112,-7.041 8.107,-7.031 8.103,-7.022 8.1,-7.012 8.097,-7.002 8.094,-6.992 8.092,-6.981 8.091,-6.971 8.09,-6.96 8.09,-6.95 8.09,-5.75 8.09,-5.74 8.091,-5.729 8.092,-5.719 8.094,-5.708 8.097,-5.698 8.1,-5.688 8.103,-5.678 8.107,-5.669 8.112,-5.659 8.117,-5.65 8.122,-5.641 8.128,-5.632 8.135,-5.624 8.141,-5.616 8.149,-5.609 8.156,-5.601 8.164,-5.595 8.172,-5.588 8.181,-5.582 8.19,-5.577 8.199,-5.572 8.209,-5.567 8.218,-5.563 8.228,-5.56 8.238,-5.557 8.248,-5.554 8.259,-5.552 8.269,-5.551 8.28,-5.55 11.29,-5.55
  Top Layer region: 11.29,23.33 8.89,23.33 8.848,23.331 8.806,23.334 8.765,23.34 8.724,23.347 8.683,23.357 8.643,23.369 8.603,23.383 8.565,23.399 8.527,23.417 8.49,23.437 8.454,23.459 8.42,23.483 8.387,23.508 8.355,23.535 8.324,23.564 8.295,23.595 8.268,23.627 8.243,23.66 8.219,23.694 8.197,23.73 8.177,23.767 8.159,23.805 8.143,23.843 8.129,23.883 8.117,23.923 8.107,23.964 8.1,24.005 8.094,24.046 8.091,24.088 8.09,24.13 8.091,24.172 8.094,24.214 8.1,24.255 8.107,24.296 8.117,24.337 8.129,24.377 8.143,24.417 8.159,24.455 8.177,24.493 8.197,24.53 8.219,24.566 8.243,24.6 8.268,24.633 8.295,24.665 8.324,24.696 8.355,24.725 8.387,24.752 8.42,24.777 8.454,24.801 8.49,24.823 8.527,24.843 8.565,24.861 8.603,24.877 8.643,24.891 8.683,24.903 8.724,24.913 8.765,24.92 8.806,24.926 8.848,24.929 8.89,24.93 11.29,24.93
  Top Layer region: 11.29,15.71 8.89,15.71 8.848,15.711 8.806,15.714 8.765,15.72 8.724,15.727 8.683,15.737 8.643,15.749 8.603,15.763 8.565,15.779 8.527,15.797 8.49,15.817 8.454,15.839 8.42,15.863 8.387,15.888 8.355,15.915 8.324,15.944 8.295,15.975 8.268,16.007 8.243,16.04 8.219,16.074 8.197,16.11 8.177,16.147 8.159,16.185 8.143,16.223 8.129,16.263 8.117,16.303 8.107,16.344 8.1,16.385 8.094,16.426 8.091,16.468 8.09,16.51 8.091,16.552 8.094,16.594 8.1,16.635 8.107,16.676 8.117,16.717 8.129,16.757 8.143,16.797 8.159,16.835 8.177,16.873 8.197,16.91 8.219,16.946 8.243,16.98 8.268,17.013 8.295,17.045 8.324,17.076 8.355,17.105 8.387,17.132 8.42,17.157 8.454,17.181 8.49,17.203 8.527,17.223 8.565,17.241 8.603,17.257 8.643,17.271 8.683,17.283 8.724,17.293 8.765,17.3 8.806,17.306 8.848,17.309 8.89,17.31 11.29,17.31
  Top Layer region: 11.29,13.17 8.89,13.17 8.848,13.171 8.806,13.174 8.765,13.18 8.724,13.187 8.683,13.197 8.643,13.209 8.603,13.223 8.565,13.239 8.527,13.257 8.49,13.277 8.454,13.299 8.42,13.323 8.387,13.348 8.355,13.375 8.324,13.404 8.295,13.435 8.268,13.467 8.243,13.5 8.219,13.534 8.197,13.57 8.177,13.607 8.159,13.645 8.143,13.683 8.129,13.723 8.117,13.763 8.107,13.804 8.1,13.845 8.094,13.886 8.091,13.928 8.09,13.97 8.091,14.012 8.094,14.054 8.1,14.095 8.107,14.136 8.117,14.177 8.129,14.217 8.143,14.257 8.159,14.295 8.177,14.333 8.197,14.37 8.219,14.406 8.243,14.44 8.268,14.473 8.295,14.505 8.324,14.536 8.355,14.565 8.387,14.592 8.42,14.617 8.454,14.641 8.49,14.663 8.527,14.683 8.565,14.701 8.603,14.717 8.643,14.731 8.683,14.743 8.724,14.753 8.765,14.76 8.806,14.766 8.848,14.769 8.89,14.77 11.29,14.77
  Top Layer region: 11.29,8.09 8.89,8.09 8.848,8.091 8.806,8.094 8.765,8.1 8.724,8.107 8.683,8.117 8.643,8.129 8.603,8.143 8.565,8.159 8.527,8.177 8.49,8.197 8.454,8.219 8.42,8.243 8.387,8.268 8.355,8.295 8.324,8.324 8.295,8.355 8.268,8.387 8.243,8.42 8.219,8.454 8.197,8.49 8.177,8.527 8.159,8.565 8.143,8.603 8.129,8.643 8.117,8.683 8.107,8.724 8.1,8.765 8.094,8.806 8.091,8.848 8.09,8.89 8.091,8.932 8.094,8.974 8.1,9.015 8.107,9.056 8.117,9.097 8.129,9.137 8.143,9.177 8.159,9.215 8.177,9.253 8.197,9.29 8.219,9.326 8.243,9.36 8.268,9.393 8.295,9.425 8.324,9.456 8.355,9.485 8.387,9.512 8.42,9.537 8.454,9.561 8.49,9.583 8.527,9.603 8.565,9.621 8.603,9.637 8.643,9.651 8.683,9.663 8.724,9.673 8.765,9.68 8.806,9.686 8.848,9.689 8.89,9.69 11.29,9.69
  Top Layer region: 11.29,3.01 8.89,3.01 8.848,3.011 8.806,3.014 8.765,3.02 8.724,3.027 8.683,3.037 8.643,3.049 8.603,3.063 8.565,3.079 8.527,3.097 8.49,3.117 8.454,3.139 8.42,3.163 8.387,3.188 8.355,3.215 8.324,3.244 8.295,3.275 8.268,3.307 8.243,3.34 8.219,3.374 8.197,3.41 8.177,3.447 8.159,3.485 8.143,3.523 8.129,3.563 8.117,3.603 8.107,3.644 8.1,3.685 8.094,3.726 8.091,3.768 8.09,3.81 8.091,3.852 8.094,3.894 8.1,3.935 8.107,3.976 8.117,4.017 8.129,4.057 8.143,4.097 8.159,4.135 8.177,4.173 8.197,4.21 8.219,4.246 8.243,4.28 8.268,4.313 8.295,4.345 8.324,4.376 8.355,4.405 8.387,4.432 8.42,4.457 8.454,4.481 8.49,4.503 8.527,4.523 8.565,4.541 8.603,4.557 8.643,4.571 8.683,4.583 8.724,4.593 8.765,4.6 8.806,4.606 8.848,4.609 8.89,4.61 11.29,4.61
  Top Layer region: 11.29,0.47 8.89,0.47 8.848,0.471 8.806,0.474 8.765,0.48 8.724,0.487 8.683,0.497 8.643,0.509 8.603,0.523 8.565,0.539 8.527,0.557 8.49,0.577 8.454,0.599 8.42,0.623 8.387,0.648 8.355,0.675 8.324,0.704 8.295,0.735 8.268,0.767 8.243,0.8 8.219,0.834 8.197,0.87 8.177,0.907 8.159,0.945 8.143,0.983 8.129,1.023 8.117,1.063 8.107,1.104 8.1,1.145 8.094,1.186 8.091,1.228 8.09,1.27 8.091,1.312 8.094,1.354 8.1,1.395 8.107,1.436 8.117,1.477 8.129,1.517 8.143,1.557 8.159,1.595 8.177,1.633 8.197,1.67 8.219,1.706 8.243,1.74 8.268,1.773 8.295,1.805 8.324,1.836 8.355,1.865 8.387,1.892 8.42,1.917 8.454,1.941 8.49,1.963 8.527,1.983 8.565,2.001 8.603,2.017 8.643,2.031 8.683,2.043 8.724,2.053 8.765,2.06 8.806,2.066 8.848,2.069 8.89,2.07 11.29,2.07
  Top Layer region: 11.29,-9.69 8.89,-9.69 8.848,-9.689 8.806,-9.686 8.765,-9.68 8.724,-9.673 8.683,-9.663 8.643,-9.651 8.603,-9.637 8.565,-9.621 8.527,-9.603 8.49,-9.583 8.454,-9.561 8.42,-9.537 8.387,-9.512 8.355,-9.485 8.324,-9.456 8.295,-9.425 8.268,-9.393 8.243,-9.36 8.219,-9.326 8.197,-9.29 8.177,-9.253 8.159,-9.215 8.143,-9.177 8.129,-9.137 8.117,-9.097 8.107,-9.056 8.1,-9.015 8.094,-8.974 8.091,-8.932 8.09,-8.89 8.091,-8.848 8.094,-8.806 8.1,-8.765 8.107,-8.724 8.117,-8.683 8.129,-8.643 8.143,-8.603 8.159,-8.565 8.177,-8.527 8.197,-8.49 8.219,-8.454 8.243,-8.42 8.268,-8.387 8.295,-8.355 8.324,-8.324 8.355,-8.295 8.387,-8.268 8.42,-8.243 8.454,-8.219 8.49,-8.197 8.527,-8.177 8.565,-8.159 8.603,-8.143 8.643,-8.129 8.683,-8.117 8.724,-8.107 8.765,-8.1 8.806,-8.094 8.848,-8.091 8.89,-8.09 11.29,-8.09
  Top Layer region: 11.29,-12.23 8.89,-12.23 8.848,-12.229 8.806,-12.226 8.765,-12.22 8.724,-12.213 8.683,-12.203 8.643,-12.191 8.603,-12.177 8.565,-12.161 8.527,-12.143 8.49,-12.123 8.454,-12.101 8.42,-12.077 8.387,-12.052 8.355,-12.025 8.324,-11.996 8.295,-11.965 8.268,-11.933 8.243,-11.9 8.219,-11.866 8.197,-11.83 8.177,-11.793 8.159,-11.755 8.143,-11.717 8.129,-11.677 8.117,-11.637 8.107,-11.596 8.1,-11.555 8.094,-11.514 8.091,-11.472 8.09,-11.43 8.091,-11.388 8.094,-11.346 8.1,-11.305 8.107,-11.264 8.117,-11.223 8.129,-11.183 8.143,-11.143 8.159,-11.105 8.177,-11.067 8.197,-11.03 8.219,-10.994 8.243,-10.96 8.268,-10.927 8.295,-10.895 8.324,-10.864 8.355,-10.835 8.387,-10.808 8.42,-10.783 8.454,-10.759 8.49,-10.737 8.527,-10.717 8.565,-10.699 8.603,-10.683 8.643,-10.669 8.683,-10.657 8.724,-10.647 8.765,-10.64 8.806,-10.634 8.848,-10.631 8.89,-10.63 11.29,-10.63
  Top Layer region: 11.29,-14.77 8.89,-14.77 8.848,-14.769 8.806,-14.766 8.765,-14.76 8.724,-14.753 8.683,-14.743 8.643,-14.731 8.603,-14.717 8.565,-14.701 8.527,-14.683 8.49,-14.663 8.454,-14.641 8.42,-14.617 8.387,-14.592 8.355,-14.565 8.324,-14.536 8.295,-14.505 8.268,-14.473 8.243,-14.44 8.219,-14.406 8.197,-14.37 8.177,-14.333 8.159,-14.295 8.143,-14.257 8.129,-14.217 8.117,-14.177 8.107,-14.136 8.1,-14.095 8.094,-14.054 8.091,-14.012 8.09,-13.97 8.091,-13.928 8.094,-13.886 8.1,-13.845 8.107,-13.804 8.117,-13.763 8.129,-13.723 8.143,-13.683 8.159,-13.645 8.177,-13.607 8.197,-13.57 8.219,-13.534 8.243,-13.5 8.268,-13.467 8.295,-13.435 8.324,-13.404 8.355,-13.375 8.387,-13.348 8.42,-13.323 8.454,-13.299 8.49,-13.277 8.527,-13.257 8.565,-13.239 8.603,-13.223 8.643,-13.209 8.683,-13.197 8.724,-13.187 8.765,-13.18 8.806,-13.174 8.848,-13.171 8.89,-13.17 11.29,-13.17
  Top Layer region: 11.29,-17.31 8.89,-17.31 8.848,-17.309 8.806,-17.306 8.765,-17.3 8.724,-17.293 8.683,-17.283 8.643,-17.271 8.603,-17.257 8.565,-17.241 8.527,-17.223 8.49,-17.203 8.454,-17.181 8.42,-17.157 8.387,-17.132 8.355,-17.105 8.324,-17.076 8.295,-17.045 8.268,-17.013 8.243,-16.98 8.219,-16.946 8.197,-16.91 8.177,-16.873 8.159,-16.835 8.143,-16.797 8.129,-16.757 8.117,-16.717 8.107,-16.676 8.1,-16.635 8.094,-16.594 8.091,-16.552 8.09,-16.51 8.091,-16.468 8.094,-16.426 8.1,-16.385 8.107,-16.344 8.117,-16.303 8.129,-16.263 8.143,-16.223 8.159,-16.185 8.177,-16.147 8.197,-16.11 8.219,-16.074 8.243,-16.04 8.268,-16.007 8.295,-15.975 8.324,-15.944 8.355,-15.915 8.387,-15.888 8.42,-15.863 8.454,-15.839 8.49,-15.817 8.527,-15.797 8.565,-15.779 8.603,-15.763 8.643,-15.749 8.683,-15.737 8.724,-15.727 8.765,-15.72 8.806,-15.714 8.848,-15.711 8.89,-15.71 11.29,-15.71
  Top Layer region: 11.29,-22.39 8.89,-22.39 8.848,-22.389 8.806,-22.386 8.765,-22.38 8.724,-22.373 8.683,-22.363 8.643,-22.351 8.603,-22.337 8.565,-22.321 8.527,-22.303 8.49,-22.283 8.454,-22.261 8.42,-22.237 8.387,-22.212 8.355,-22.185 8.324,-22.156 8.295,-22.125 8.268,-22.093 8.243,-22.06 8.219,-22.026 8.197,-21.99 8.177,-21.953 8.159,-21.915 8.143,-21.877 8.129,-21.837 8.117,-21.797 8.107,-21.756 8.1,-21.715 8.094,-21.674 8.091,-21.632 8.09,-21.59 8.091,-21.548 8.094,-21.506 8.1,-21.465 8.107,-21.424 8.117,-21.383 8.129,-21.343 8.143,-21.303 8.159,-21.265 8.177,-21.227 8.197,-21.19 8.219,-21.154 8.243,-21.12 8.268,-21.087 8.295,-21.055 8.324,-21.024 8.355,-20.995 8.387,-20.968 8.42,-20.943 8.454,-20.919 8.49,-20.897 8.527,-20.877 8.565,-20.859 8.603,-20.843 8.643,-20.829 8.683,-20.817 8.724,-20.807 8.765,-20.8 8.806,-20.794 8.848,-20.791 8.89,-20.79 11.29,-20.79
  Top Layer region: 11.29,-24.93 8.89,-24.93 8.848,-24.929 8.806,-24.926 8.765,-24.92 8.724,-24.913 8.683,-24.903 8.643,-24.891 8.603,-24.877 8.565,-24.861 8.527,-24.843 8.49,-24.823 8.454,-24.801 8.42,-24.777 8.387,-24.752 8.355,-24.725 8.324,-24.696 8.295,-24.665 8.268,-24.633 8.243,-24.6 8.219,-24.566 8.197,-24.53 8.177,-24.493 8.159,-24.455 8.143,-24.417 8.129,-24.377 8.117,-24.337 8.107,-24.296 8.1,-24.255 8.094,-24.214 8.091,-24.172 8.09,-24.13 8.091,-24.088 8.094,-24.046 8.1,-24.005 8.107,-23.964 8.117,-23.923 8.129,-23.883 8.143,-23.843 8.159,-23.805 8.177,-23.767 8.197,-23.73 8.219,-23.694 8.243,-23.66 8.268,-23.627 8.295,-23.595 8.324,-23.564 8.355,-23.535 8.387,-23.508 8.42,-23.483 8.454,-23.459 8.49,-23.437 8.527,-23.417 8.565,-23.399 8.603,-23.383 8.643,-23.369 8.683,-23.357 8.724,-23.347 8.765,-23.34 8.806,-23.334 8.848,-23.331 8.89,-23.33 11.29,-23.33
  Top Layer region: 11.29,5.55 8.28,5.55 8.269,5.551 8.259,5.552 8.248,5.554 8.238,5.557 8.228,5.56 8.218,5.563 8.209,5.567 8.199,5.572 8.19,5.577 8.181,5.582 8.172,5.588 8.164,5.595 8.156,5.601 8.149,5.609 8.141,5.616 8.135,5.624 8.128,5.632 8.122,5.641 8.117,5.65 8.112,5.659 8.107,5.669 8.103,5.678 8.1,5.688 8.097,5.698 8.094,5.708 8.092,5.719 8.091,5.729 8.09,5.74 8.09,5.75 8.09,6.95 8.09,6.96 8.091,6.971 8.092,6.981 8.094,6.992 8.097,7.002 8.1,7.012 8.103,7.022 8.107,7.031 8.112,7.041 8.117,7.05 8.122,7.059 8.128,7.068 8.135,7.076 8.141,7.084 8.149,7.091 8.156,7.099 8.164,7.105 8.172,7.112 8.181,7.118 8.19,7.123 8.199,7.128 8.209,7.133 8.218,7.137 8.228,7.14 8.238,7.143 8.248,7.146 8.259,7.148 8.269,7.149 8.28,7.15 11.29,7.15
  Top Layer region: 11.29,-19.85 8.28,-19.85 8.269,-19.849 8.259,-19.848 8.248,-19.846 8.238,-19.843 8.228,-19.84 8.218,-19.837 8.209,-19.833 8.199,-19.828 8.19,-19.823 8.181,-19.818 8.172,-19.812 8.164,-19.805 8.156,-19.799 8.149,-19.791 8.141,-19.784 8.135,-19.776 8.128,-19.768 8.122,-19.759 8.117,-19.75 8.112,-19.741 8.107,-19.731 8.103,-19.722 8.1,-19.712 8.097,-19.702 8.094,-19.692 8.092,-19.681 8.091,-19.671 8.09,-19.66 8.09,-19.65 8.09,-18.45 8.09,-18.44 8.091,-18.429 8.092,-18.419 8.094,-18.408 8.097,-18.398 8.1,-18.388 8.103,-18.378 8.107,-18.369 8.112,-18.359 8.117,-18.35 8.122,-18.341 8.128,-18.332 8.135,-18.324 8.141,-18.316 8.149,-18.309 8.156,-18.301 8.164,-18.295 8.172,-18.288 8.181,-18.282 8.19,-18.277 8.199,-18.272 8.209,-18.267 8.218,-18.263 8.228,-18.26 8.238,-18.257 8.248,-18.254 8.259,-18.252 8.269,-18.251 8.28,-18.25 11.29,-18.25
  Top Layer region: -2.498,-23.101 -2.456,-23.104 -2.415,-23.11 -2.374,-23.117 -2.333,-23.127 -2.293,-23.139 -2.253,-23.153 -2.215,-23.169 -2.177,-23.187 -2.14,-23.207 -2.104,-23.229 -2.07,-23.253 -2.037,-23.278 -2.005,-23.305 -1.974,-23.334 -1.945,-23.365 -1.918,-23.397 -1.893,-23.43 -1.869,-23.464 -1.847,-23.5 -1.827,-23.537 -1.809,-23.575 -1.793,-23.613 -1.779,-23.653 -1.767,-23.693 -1.757,-23.734 -1.75,-23.775 -1.744,-23.816 -1.741,-23.858 -1.74,-23.9 -1.74,-26.3 -3.34,-26.3 -3.34,-23.9 -3.339,-23.858 -3.336,-23.816 -3.33,-23.775 -3.323,-23.734 -3.313,-23.693 -3.301,-23.653 -3.287,-23.613 -3.271,-23.575 -3.253,-23.537 -3.233,-23.5 -3.211,-23.464 -3.187,-23.43 -3.162,-23.397 -3.135,-23.365 -3.106,-23.334 -3.075,-23.305 -3.043,-23.278 -3.01,-23.253 -2.976,-23.229 -2.94,-23.207 -2.903,-23.187 -2.865,-23.169 -2.827,-23.153 -2.787,-23.139 -2.747,-23.127 -2.706,-23.117 -2.665,-23.11 -2.624,-23.104 -2.582,-23.101 -2.54,-23.1
  Top Layer region: 0.621,-23.101 0.631,-23.102 0.642,-23.104 0.652,-23.107 0.662,-23.11 0.672,-23.113 0.681,-23.117 0.691,-23.122 0.7,-23.127 0.709,-23.132 0.718,-23.138 0.726,-23.145 0.734,-23.151 0.741,-23.159 0.749,-23.166 0.755,-23.174 0.762,-23.182 0.768,-23.191 0.773,-23.2 0.778,-23.209 0.783,-23.219 0.787,-23.228 0.79,-23.238 0.793,-23.248 0.796,-23.258 0.798,-23.269 0.799,-23.279 0.8,-23.29 0.8,-23.3 0.8,-26.3 -0.8,-26.3 -0.8,-23.3 -0.8,-23.29 -0.799,-23.279 -0.798,-23.269 -0.796,-23.258 -0.793,-23.248 -0.79,-23.238 -0.787,-23.228 -0.783,-23.219 -0.778,-23.209 -0.773,-23.2 -0.768,-23.191 -0.762,-23.182 -0.755,-23.174 -0.749,-23.166 -0.741,-23.159 -0.734,-23.151 -0.726,-23.145 -0.718,-23.138 -0.709,-23.132 -0.7,-23.127 -0.691,-23.122 -0.681,-23.117 -0.672,-23.113 -0.662,-23.11 -0.652,-23.107 -0.642,-23.104 -0.631,-23.102 -0.621,-23.101 -0.61,-23.1 0.61,-23.1
  Top Layer region: 2.582,-23.101 2.624,-23.104 2.665,-23.11 2.706,-23.117 2.747,-23.127 2.787,-23.139 2.827,-23.153 2.865,-23.169 2.903,-23.187 2.94,-23.207 2.976,-23.229 3.01,-23.253 3.043,-23.278 3.075,-23.305 3.106,-23.334 3.135,-23.365 3.162,-23.397 3.187,-23.43 3.211,-23.464 3.233,-23.5 3.253,-23.537 3.271,-23.575 3.287,-23.613 3.301,-23.653 3.313,-23.693 3.323,-23.734 3.33,-23.775 3.336,-23.816 3.339,-23.858 3.34,-23.9 3.34,-26.3 1.74,-26.3 1.74,-23.9 1.741,-23.858 1.744,-23.816 1.75,-23.775 1.757,-23.734 1.767,-23.693 1.779,-23.653 1.793,-23.613 1.809,-23.575 1.827,-23.537 1.847,-23.5 1.869,-23.464 1.893,-23.43 1.918,-23.397 1.945,-23.365 1.974,-23.334 2.005,-23.305 2.037,-23.278 2.07,-23.253 2.104,-23.229 2.14,-23.207 2.177,-23.187 2.215,-23.169 2.253,-23.153 2.293,-23.139 2.333,-23.127 2.374,-23.117 2.415,-23.11 2.456,-23.104 2.498,-23.101 2.54,-23.1
  Top Layer region: -8.848,24.929 -8.806,24.926 -8.765,24.92 -8.724,24.913 -8.683,24.903 -8.643,24.891 -8.603,24.877 -8.565,24.861 -8.527,24.843 -8.49,24.823 -8.454,24.801 -8.42,24.777 -8.387,24.752 -8.355,24.725 -8.324,24.696 -8.295,24.665 -8.268,24.633 -8.243,24.6 -8.219,24.566 -8.197,24.53 -8.177,24.493 -8.159,24.455 -8.143,24.417 -8.129,24.377 -8.117,24.337 -8.107,24.296 -8.1,24.255 -8.094,24.214 -8.091,24.172 -8.09,24.13 -8.091,24.088 -8.094,24.046 -8.1,24.005 -8.107,23.964 -8.117,23.923 -8.129,23.883 -8.143,23.843 -8.159,23.805 -8.177,23.767 -8.197,23.73 -8.219,23.694 -8.243,23.66 -8.268,23.627 -8.295,23.595 -8.324,23.564 -8.355,23.535 -8.387,23.508 -8.42,23.483 -8.454,23.459 -8.49,23.437 -8.527,23.417 -8.565,23.399 -8.603,23.383 -8.643,23.369 -8.683,23.357 -8.724,23.347 -8.765,23.34 -8.806,23.334 -8.848,23.331 -8.89,23.33 -11.29,23.33 -11.29,24.93 -8.89,24.93
  silkscreen extent -12.29,-25.5 10.5,26.8, body extent -10.5,-25.5 10.5,26.8, height 3.73

## Part data
J1 J2: library part CMP-04776-000067-1, "CONN HEADER VERT 6POS 2.54MM", Current Rating=3A, Manufacturer=Molex, Package=0, Temperature="-40°C to +105°C", Temperature Range High=+105°C, Temperature Range Low=-40°C, Voltage Rating=250V, Automotive=No, Category=Conn, ComponentLink2Description=Datasheet, ComponentLink2URL=https://www.molex.com/webdocs/datasheets/pdf/en-us/0705430005_PCB_HEADERS.pdf, Conn Gender=Male, Conn Orientation=Vertical, Contact Material=Gold,Tin, Device Class L1=Connectors, Device Class L2="Headers and Wire Housings", Device Class L3=unset, Digikey Description="CONN HEADER VERT 6POS 2.54MM", Footprint Url=https://www.molex.com/pdm_docs/sd/705430005_sd.pdf, Height=11.56mm, Lead Free=Yes, Manufacturer Part Number=0705430005, Mouser Description="Connector Shrouded Header 6 Position 2.54mm Solder Straight Thru-Hole Tube", Number of Contacts=6, Number Of Rows=1, Octopart=https://octopart.com/70543-0005-molex-12981, Pitch=2.54mm, RoHS=TRUE, Standoff Height=0.25mm
J4 J5 J6 J7 J8: library part CMP-1502-03258-2, Color=Blue, Current=15A, Max Operating Temperature=105°C, Min Operating Temperature=-40°C, Voltage=300V, Contact Material=Brass, Contact Plating=Tin, Current Rating=15A, Height=13.4mm, Housing Material=Nylon, Lead Pitch=5mm, Length=7.5mm, Mount="Through Hole", NexarPartId=8917706, Number of Contacts=2, Number of Levels=1, Number of Pins=2, Number of Positions Per Level=2, Packaging=Box, Pitch=5.0038mm, Plating=Steel, REACH SVHC=Unknown, RoHS=Compliant, Stripping Length=-6mm, Termination=Screw, Voltage Rating=300V, Width=11.2mm, Wire Gauge (Max)=22AWG, Wire Gauge (Min)=14AWG, Wire/Cable Gauge=22AWG
U1: library part CMP-023-000000-1, "RP2040 Raspberry Pi Pico series ARMÂ® CortexÂ®-M0+ MCU 32-Bit Embedded Evaluation Board", Package=None, Availability="In Stock", Check_prices=https://www.snapeda.com/parts/SC0915/Raspberry+Pi/view-part/?ref=eda, Component Type=Standard, Design Item ID=SC0915, MF="Raspberry Pi", MP=SC0915, Pin Count=53, Price=None, Purchase-URL=https://pricing.snapeda.com/search/part/SC0915/?ref=eda, SnapEDA_Link=https://www.snapeda.com/parts/SC0915/Raspberry+Pi/view-part/?ref=snap, Source=SC0915.SchLib
U2: library part CMP-025-000000-1, "Module: multiplexer; I2C interface multiplexer; TCA9548A; 3Ã·5VDC", Package=None, Availability="In Stock", Check_prices=https://www.snapeda.com/parts/2717/Adafruit+Industries+LLC/view-part/?ref=eda, Component Type=Standard, Design Item ID=2717, MF=Adafruit, MP=2717, Pin Count=24, Price=None, Purchase-URL=https://pricing.snapeda.com/search/part/2717/?ref=eda, SnapEDA_Link=https://www.snapeda.com/parts/2717/Adafruit+Industries+LLC/view-part/?ref=snap, Source=2717.SchLib

## Nets (pads, with @x,y where several pads share a name; then routed paths per layer and width w, separated by ;. In a path a pad name is that pad's centre, name@x,y a point inside that pad or via, vN(x,y) a via of type N, cw(c..) or ccw(c..) an arc to the next point about the centre after c; other vN are vias at no path point)
GND: J1.1 J1.2 J1.3 J1.4 J4.2 U1.3 U1.8 U1.13 U1.18 U1.23 U1.28 U1.38 U1.D2 U2.2 | length 6583.5
  Top Layer w10: J1.1 245,1450 290,1405 ; U1.18 870,761.5 ; U1.3 408.82,1800.31 292.22,1800.31 241.9,1750 J1.4 290,1570 290,1405 ; U1.D2 1027.44,315 U1.23 1236.5,365 1591.85,365 ; U1.28 923.5,815 870,761.5 ; 1246.72,1815 U1.38 ; U2.2 1354.07,1950 1233.75,1829.69 1201.18,1829.69 U1.38 ; J4.2 1591.85,365 ; 290,1405 380,1315 U1.8 ; U1.8 686.5,1315 U1.38 ; U1.8 423.5,1280.31 442.32,1261.5 474.28,1261.5 501.5,1234.28 501.5,892.99 U1.13 477.01,761.5 870,761.5 ; 870,761.5 1255.7,761.5 1527.39,489.81 1527.39,429.46 1591.85,365
NetJ5_1: J5.1 U2.10 | length 1180.4
  Top Layer w10: U2.10 1955.31,1705.31 2031.77,1705.31 2189.6,1863.15 J5.1
NetJ5_2: J5.2 U2.9 | length 1316.1
  Top Layer w10: U2.9 1407.88,1257.88 1407.88,1294.69 1695.47,1582.27 1695.47,1708.66 1981.49,1994.69 2219.69,1994.69 J5.2
NetJ6_1: J6.1 U2.12 | length 2676.7
  Top Layer w10: U2.12 1400,870 2178.39,91.61 2318.36,91.61 2338.39,111.64 2338.39,282.61 2358.39,302.61 2358.39,372.25 2203.75,526.88 2203.75,535.16 2338.39,669.79 2338.39,742.57 2307.11,773.84 2307.11,846.61 2338.39,877.89 2338.39,1118.42 2285,1171.81 J6.1
NetJ6_2: J6.2 U2.11 | length 1054.8
  Top Layer w10: U2.11 1616.54,1050 1961.23,1394.69 2219.69,1394.69 J6.2
NetJ7_1: J7.1 U2.14 | length 1929.3
  Top Layer w10: U2.14 1955.31,1005.31 1955.31,996.79 1935.31,976.79 1935.31,923.21 1980,878.52 1980,571.35 2262.89,288.46 2307.11,288.46 2338.39,319.74 2338.39,363.96 2049.4,652.95 2049.4,825.69 2055.25,831.55 2156.6,831.55 J7.1
NetJ7_2: J7.2 U2.13 | length 305.1
  Top Layer w10: U2.13 2235,950 2278.07,906.93 J7.2@2278.07,897.77
NetJ8_1: J8.1 U2.16 | length 1377
  Top Layer w10: U2.16 2044.69,1205.31 2044.69,1131.49 2007.88,1094.69 1981.49,1094.69 1915.31,1028.51 1915.31,914.92 1955.31,874.92 1955.31,421.3 2231.61,145 J8.1
NetJ8_2: J8.2 U2.15 | length 1380.3
  Top Layer w10: U2.15 1992.12,1157.88 1992.12,1194.69 1955.31,1231.49 1955.31,1268.51 1981.49,1294.69 2018.51,1294.69 2064.69,1248.51 2064.69,1051.49 2018.51,1005.31 1992.12,1005.31 1955.31,968.51 1955.31,931.49 2029.4,857.41 2029.4,597.45 J8.2
PWM1: J1.6 U1.14 | length 1609.6
  Top Layer w10: J1.6 158.27,1901.73 158.27,1830.01 128.26,1800 91.74,1800 61.73,1769.99 61.73,1730.01 91.74,1700 128.26,1700 158.27,1669.99 158.27,1530.01 129.99,1501.73 73.98,1501.73 61.73,1489.48 61.73,1226.53 208.02,1080.25 208.02,914.79 393.12,729.69 408.82,729.69 U1.14
PWM2: J2.1 U1.15 | length 315.6
  Top Layer w10: J2.1 418.5,610 U1.15
PWM3: J2.2 U1.16 | length 544.2
  Top Layer w10: J2.2 61.73,661.73 61.73,570.52 102.57,529.69 408.82,529.69 U1.16
PWM4: J2.3 U1.17 | length 718.8
  Top Layer w10: J2.3 41.73,741.73 41.73,562.23 135.46,468.5 370,468.5 U1.17
SCL: U1.2 U2.4 | length 1838.4
  Top Layer w10: U1.2 370,1968.5 354.3,1968.5 345.51,1977.29 345.51,2061.66 418.85,2135 1495.86,2135 1550,2080.86 1550,1900 U2.4
SDA: U1.1 U2.3 | length 1426.1
  Top Layer w10: U1.1 455,2046.5 523.5,2115 1420,2115 1482.99,2052.01 1482.99,1861.27 1446.72,1825 1429.91,1825 1404.91,1850 U2.3
VCC: J1.5 J4.1 U1.39 U2.1 | length 5345.4
  Top Layer w10: U2.1 1265,1915 U1.39 983.2,1915 915.25,1847.05 502.55,1847.05 487.43,1862.17 360.63,1862.17 264.89,1957.91 264.89,2055.11 169.14,2150.86 160.86,2150.86 61.73,2051.73 61.73,1898.27 J1.5 21.73,1761.73 21.73,343.27 296.5,68.5 488.27,68.5 590.31,170.55 724.28,170.55 751.5,143.34 751.5,30.36 767.29,14.57 1201.76,14.57 1332.2,145 J4.1
pads on no net: J2.4 J2.5 J2.6 U1.4 U1.5 U1.6 U1.7 U1.9 U1.10 U1.11 U1.12 U1.19 U1.20 U1.21 U1.22 U1.24 U1.25 U1.26 U1.27 U1.29 U1.30 U1.31 U1.32 U1.33 U1.34 U1.35 U1.36 U1.37 U1.40 U1.A U1.B U1.C U1.D U1.D1 U1.D3 U1.TP1 U1.TP2 U1.TP3 U1.TP4 U1.TP5 U1.TP6 U2.5 U2.6 U2.7 U2.8 U2.17 U2.18 U2.19 U2.20 U2.21 U2.22 U2.23 U2.24 U2.P1 U2.P2